# Altium PCB Route_Guide_and_Tuning.PcbDoc (part 7 of 8)
Units mil, origin at the board's own origin, x right, y up, seen from the top; angles counter-clockwise.
Board outline 3600 x 2300 mil, 14 copper layers (L1 TOP, L2_G, L3 SIG, L4_G, L4 SIG, L6_P, L7_G, L10_P, L11_P, L7 SIG, L13_P, L8 SIG, L15_G, L10 BOT), stack 89.291 mil thick; 4 components, 1934 nets, 2174 pads, 2165 vias.
Unrouted connection lines stored in the file: 123.
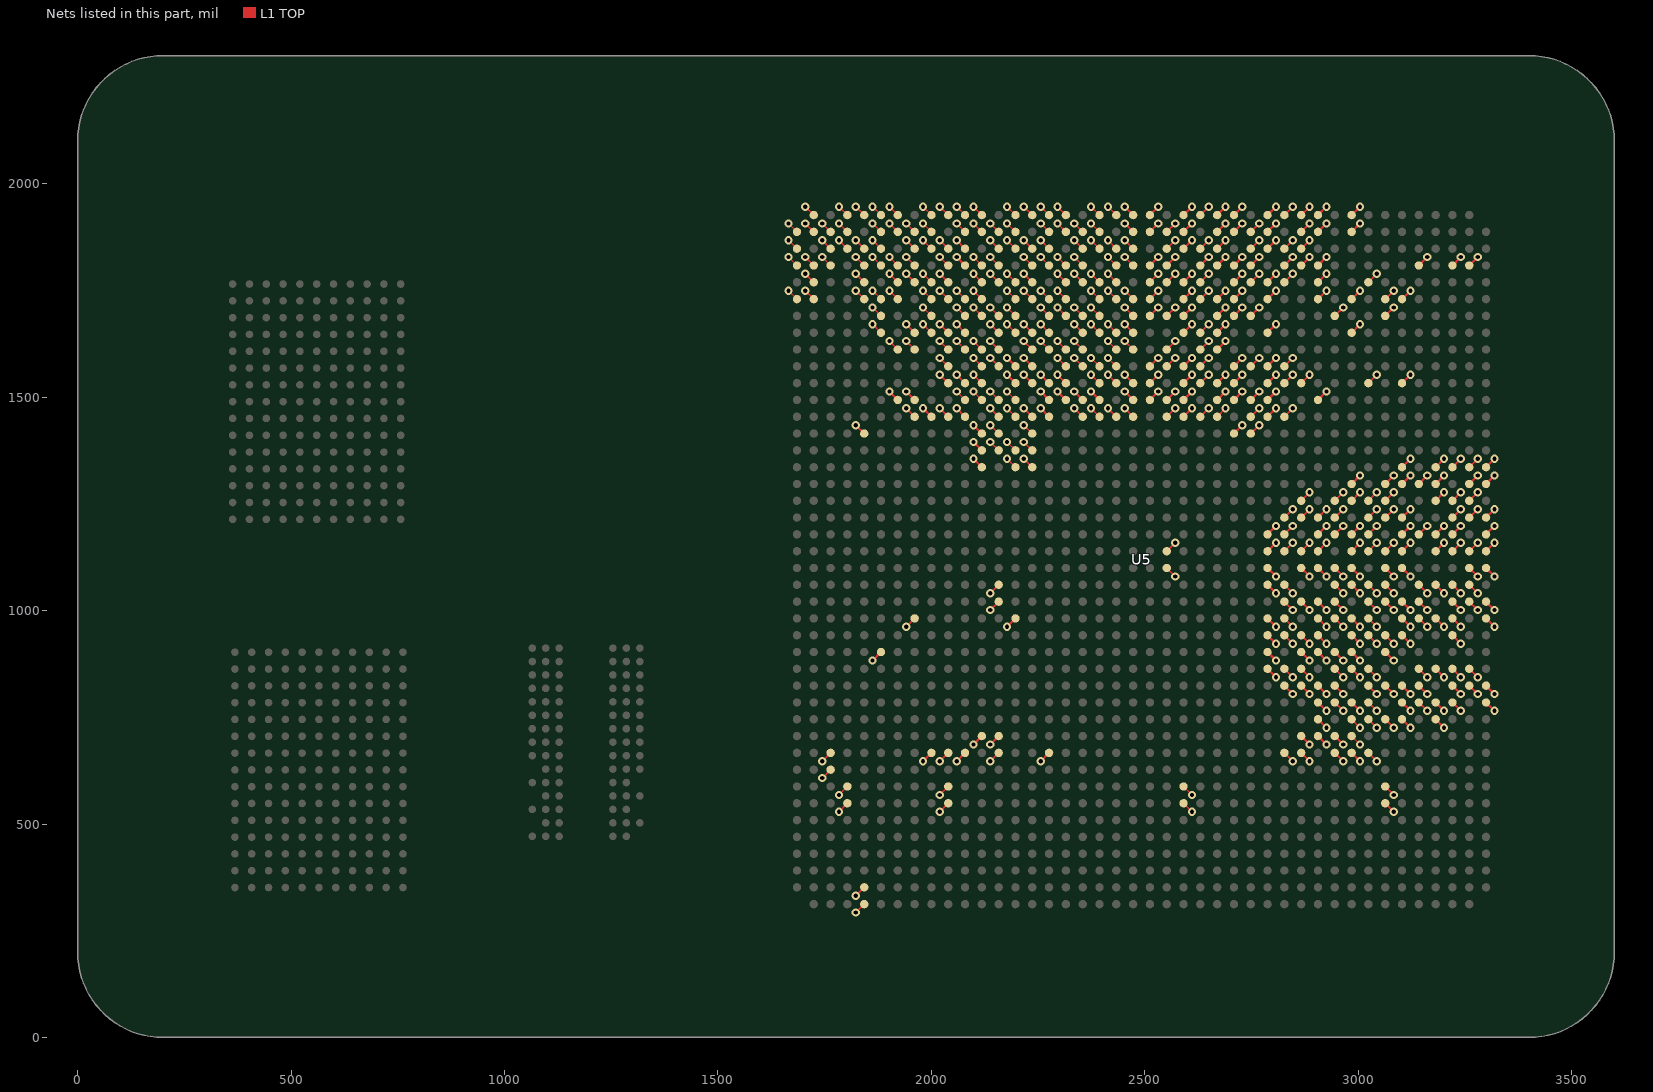
[diagram p19: the nets of this part, all layers, seen from the top]

## Via types
v1: diameter 19.4, hole 10, L1 TOP to L10 BOT, 2087 vias
v2: diameter 18.6, hole 10, L1 TOP to L10 BOT, tented both sides, 78 vias

## Nets (pads, with @x,y where several pads share a name; then routed paths per layer and width w, separated by ;. In a path a pad name is that pad's centre, name@x,y a point inside that pad or via, vN(x,y) a via of type N, cw(c..) or ccw(c..) an arc to the next point about the centre after c; other vN are vias at no path point) (continued)
QDR2.A2: U5.AL40 | length 27.8
  L1 TOP w5: U5.AL40@2866.26,1847.72 v1(2885.95,1867.4)
QDR2.A3: U5.AK39 | length 27.8
  L1 TOP w5: U5.AK39@2826.89,1808.35 v1(2846.58,1828.03)
QDR2.A4: U5.AJ41 | length 27.8
  L1 TOP w5: U5.AJ41@2787.52,1887.09 v1(2807.21,1906.77)
QDR2.A5: U5.AH41 | length 27.8
  L1 TOP w5: U5.AH41@2748.15,1887.09 v1(2767.84,1906.77)
QDR2.A6: U5.AF39 | length 27.8
  L1 TOP w5: U5.AF39@2669.41,1808.35 v1(2689.1,1828.03)
QDR2.A7: U5.AG39 | length 27.8
  L1 TOP w5: U5.AG39@2708.78,1808.35 v1(2728.47,1828.03)
QDR2.A8: U5.AJ42 | length 27.8
  L1 TOP w5: U5.AJ42@2787.52,1926.46 v1(2807.21,1946.14)
QDR2.A9: U5.AG41 | length 27.8
  L1 TOP w5: U5.AG41@2708.78,1887.09 v1(2728.47,1906.77)
QDR2.A10: U5.AG36 | length 27.8
  L1 TOP w5: U5.AG36@2708.78,1690.24 v1(2728.47,1709.92)
QDR2.A11: U5.AK42 | length 27.8
  L1 TOP w5: U5.AK42@2826.89,1926.46 v1(2846.58,1946.14)
QDR2.A12: U5.AJ40 | length 27.8
  L1 TOP w5: U5.AJ40@2787.52,1847.72 v1(2807.21,1867.4)
QDR2.A13: U5.AH39 | length 27.8
  L1 TOP w5: U5.AH39@2748.15,1808.35 v1(2767.84,1828.03)
QDR2.A14: U5.AG38 | length 27.8
  L1 TOP w5: U5.AG38@2708.78,1768.98 v1(2728.47,1788.66)
QDR2.A15: U5.AG42 | length 27.8
  L1 TOP w5: U5.AG42@2708.78,1926.46 v1(2728.47,1946.14)
QDR2.A16: U5.AF40 | length 27.8
  L1 TOP w5: U5.AF40@2669.41,1847.72 v1(2689.1,1867.4)
QDR2.A17: U5.AJ35 | length 27.8
  L1 TOP w5: U5.AJ35@2787.52,1650.87 v1(2807.21,1670.55)
QDR2.A18: U5.AK38 | length 27.8
  L1 TOP w5: U5.AK38@2826.89,1768.98 v1(2846.58,1788.66)
QDR2.A19: U5.AF37 | length 27.8
  L1 TOP w5: U5.AF37@2669.41,1729.61 v1(2689.1,1749.29)
QDR2.A20: U5.AL39 | length 27.8
  L1 TOP w5: U5.AL39@2866.26,1808.35 v1(2885.95,1828.03)
QDR2.BWN0: 
QDR2.BWN1: 
QDR2.BWN2: 
QDR2.BWN3: 
QDR2.D0: U5.AA41 | length 27.8
  L1 TOP w5: v1(2452.87,1906.77) U5.AA41@2472.56,1887.09
QDR2.D1: U5.AB41 | length 27.8
  L1 TOP w5: U5.AB41@2511.93,1887.09 v1(2531.62,1906.77)
QDR2.D2: U5.AB36 | length 27.8
  L1 TOP w5: U5.AB36@2511.93,1690.24 v1(2531.62,1709.92)
QDR2.D3: U5.AB33 | length 27.8
  L1 TOP w5: U5.AB33@2511.93,1572.13 v1(2531.62,1591.81)
QDR2.D4: U5.AD42 | length 27.8
  L1 TOP w5: U5.AD42@2590.67,1926.46 v1(2610.36,1946.14)
QDR2.D5: U5.AB32 | length 27.8
  L1 TOP w5: U5.AB32@2511.93,1532.76 v1(2531.62,1552.44)
QDR2.D6: U5.AE40 | length 27.8
  L1 TOP w5: U5.AE40@2630.04,1847.72 v1(2649.73,1867.4)
QDR2.D7: U5.AD37 | length 27.8
  L1 TOP w5: U5.AD37@2590.67,1729.61 v1(2610.36,1749.29)
QDR2.D8: U5.AC33 | length 27.8
  L1 TOP w5: U5.AC33@2551.3,1572.13 v1(2570.99,1591.81)
QDR2.D9: U5.AA42 | length 27.8
  L1 TOP w5: v1(2452.87,1946.14) U5.AA42@2472.56,1926.46
QDR2.D10: U5.AB39 | length 27.8
  L1 TOP w5: U5.AB39@2511.93,1808.35 v1(2531.62,1828.03)
QDR2.D11: U5.AB38 | length 27.8
  L1 TOP w5: U5.AB38@2511.93,1768.98 v1(2531.62,1788.66)
QDR2.D12: U5.AD41 | length 27.8
  L1 TOP w5: U5.AD41@2590.67,1887.09 v1(2610.36,1906.77)
QDR2.D13: U5.AC36 | length 27.8
  L1 TOP w5: U5.AC36@2551.3,1690.24 v1(2570.99,1709.92)
QDR2.D14: U5.AE39 | length 27.8
  L1 TOP w5: U5.AE39@2630.04,1808.35 v1(2649.73,1828.03)
QDR2.D15: U5.AD36 | length 27.8
  L1 TOP w5: U5.AD36@2590.67,1690.24 v1(2610.36,1709.92)
QDR2.D16: U5.AE34 | length 27.8
  L1 TOP w5: U5.AE34@2630.04,1611.5 v1(2649.73,1631.18)
QDR2.D17: U5.AG37 | length 27.8
  L1 TOP w5: U5.AG37@2708.78,1729.61 v1(2728.47,1749.29)
QDR2.D18: U5.AJ37 | length 27.8
  L1 TOP w5: U5.AJ37@2787.52,1729.61 v1(2807.21,1749.29)
QDR2.D19: U5.AJ38 | length 27.8
  L1 TOP w5: U5.AJ38@2787.52,1768.98 v1(2807.21,1788.66)
QDR2.D20: U5.AM39 | length 27.8
  L1 TOP w5: U5.AM39@2905.63,1808.35 v1(2925.32,1828.03)
QDR2.D21: U5.AL41 | length 27.8
  L1 TOP w5: U5.AL41@2866.26,1887.09 v1(2885.95,1906.77)
QDR2.D22: U5.AF34 | length 27.8
  L1 TOP w5: U5.AF34@2669.41,1611.5 v1(2689.1,1631.18)
QDR2.D23: U5.AD32 | length 27.8
  L1 TOP w5: U5.AD32@2590.67,1532.76 v1(2610.36,1552.44)
QDR2.D24: U5.AP35 | length 27.8
  L1 TOP w5: U5.AP35@2984.37,1650.87 v1(3004.06,1670.55)
QDR2.D25: U5.AR20 | length 27.8
  L1 TOP w5: U5.AR20@3023.74,1060.32 v1(3043.43,1040.63)
QDR2.D26: U5.AF36 | length 27.8
  L1 TOP w5: U5.AF36@2669.41,1690.24 v1(2689.1,1709.92)
QDR2.D27: U5.AM38 | length 27.8
  L1 TOP w5: U5.AM38@2905.63,1768.98 v1(2925.32,1788.66)
QDR2.D28: U5.AP41 | length 27.8
  L1 TOP w5: U5.AP41@2984.37,1887.09 v1(3004.06,1906.77)
QDR2.D29: U5.AK40 | length 27.8
  L1 TOP w5: U5.AK40@2826.89,1847.72 v1(2846.58,1867.4)
QDR2.D30: U5.AT20 | length 27.8
  L1 TOP w5: U5.AT20@3063.11,1060.32 v1(3082.8,1040.63)
QDR2.D31: U5.AP42 | length 27.8
  L1 TOP w5: U5.AP42@2984.37,1926.46 v1(3004.06,1946.14)
QDR2.D32: U5.AM37 | length 27.8
  L1 TOP w5: U5.AM37@2905.63,1729.61 v1(2925.32,1749.29)
QDR2.D33: U5.AM31 | length 27.8
  L1 TOP w5: U5.AM31@2905.63,1493.39 v1(2925.32,1513.07)
QDR2.D34: U5.AR32 | length 27.8
  L1 TOP w5: U5.AR32@3023.74,1532.76 v1(3043.43,1552.44)
QDR2.D35: U5.AU32 | length 27.8
  L1 TOP w5: U5.AU32@3102.48,1532.76 v1(3122.17,1552.44)
QDR2.DOFFN: U5.P18 | length 27.8
  L1 TOP w5: v1(2177.28,961.89) U5.P18@2196.97,981.57
QDR2.K: U5.AH40 | length 27.8
  L1 TOP w5: U5.AH40@2748.15,1847.72 v1(2767.84,1867.4)
QDR2.KN: U5.AM42 | length 27.8
  L1 TOP w5: U5.AM42@2905.63,1926.46 v1(2925.32,1946.14)
QDR2.Q0: U5.AA40 | length 27.8
  L1 TOP w5: v1(2452.87,1867.4) U5.AA40@2472.56,1847.72
QDR2.Q1: U5.AE33 | length 27.8
  L1 TOP w5: U5.AE33@2630.04,1572.13 v1(2649.73,1591.81)
QDR2.Q2: U5.AE32 | length 27.8
  L1 TOP w5: U5.AE32@2630.04,1532.76 v1(2649.73,1552.44)
QDR2.Q3: U5.AC40 | length 27.8
  L1 TOP w5: U5.AC40@2551.3,1847.72 v1(2570.99,1867.4)
QDR2.Q4: U5.AC34 | length 27.8
  L1 TOP w5: U5.AC34@2551.3,1611.5 v1(2570.99,1631.18)
QDR2.Q5: U5.AE42 | length 27.8
  L1 TOP w5: U5.AE42@2630.04,1926.46 v1(2649.73,1946.14)
QDR2.Q6: U5.AD33 | length 27.8
  L1 TOP w5: U5.AD33@2590.67,1572.13 v1(2610.36,1591.81)
QDR2.Q7: U5.AE38 | length 27.8
  L1 TOP w5: U5.AE38@2630.04,1768.98 v1(2649.73,1788.66)
QDR2.Q8: U5.AE37 | length 27.8
  L1 TOP w5: U5.AE37@2630.04,1729.61 v1(2649.73,1749.29)
QDR2.Q9: U5.AB42 | length 27.8
  L1 TOP w5: U5.AB42@2511.93,1926.46 v1(2531.62,1946.14)
QDR2.Q10: U5.AB37 | length 27.8
  L1 TOP w5: U5.AB37@2511.93,1729.61 v1(2531.62,1749.29)
QDR2.Q11: U5.AC41 | length 27.8
  L1 TOP w5: U5.AC41@2551.3,1887.09 v1(2570.99,1906.77)
QDR2.Q12: U5.AC38 | length 27.8
  L1 TOP w5: U5.AC38@2551.3,1768.98 v1(2570.99,1788.66)
QDR2.Q13: U5.AD40 | length 27.8
  L1 TOP w5: U5.AD40@2590.67,1847.72 v1(2610.36,1867.4)
QDR2.Q14: U5.AD38 | length 27.8
  L1 TOP w5: U5.AD38@2590.67,1768.98 v1(2610.36,1788.66)
QDR2.Q15: U5.AF41 | length 27.8
  L1 TOP w5: U5.AF41@2669.41,1887.09 v1(2689.1,1906.77)
QDR2.Q16: U5.AF42 | length 27.8
  L1 TOP w5: U5.AF42@2669.41,1926.46 v1(2689.1,1946.14)
QDR2.Q17: U5.AE35 | length 27.8
  L1 TOP w5: U5.AE35@2630.04,1650.87 v1(2649.73,1670.55)
QDR2.Q18: U5.AR38 | length 27.8
  L1 TOP w5: U5.AR38@3023.74,1768.98 v1(3043.43,1788.66)
QDR2.Q19: U5.AJ21 | length 27.8
  L1 TOP w5: U5.AJ21@2787.52,1099.69 v1(2807.21,1080)
QDR2.Q20: U5.AP37 | length 27.8
  L1 TOP w5: U5.AP37@2984.37,1729.61 v1(3004.06,1749.29)
QDR2.Q21: U5.AT37 | length 27.8
  L1 TOP w5: U5.AT37@3063.11,1729.61 v1(3082.8,1749.29)
QDR2.Q22: U5.AN36 | length 27.8
  L1 TOP w5: U5.AN36@2945,1690.24 v1(2964.69,1709.92)
QDR2.Q23: U5.AV23 | length 27.8
  L1 TOP w5: U5.AV23@3141.85,1178.43 v1(3161.54,1198.11)
QDR2.Q24: U5.AU22 | length 27.8
  L1 TOP w5: U5.AU22@3102.48,1139.06 v1(3122.17,1158.74)
QDR2.Q25: U5.BB24 | length 27.8
  L1 TOP w5: U5.BB24@3299.33,1217.8 v1(3319.02,1237.48)
QDR2.Q26: U5.BA39 | length 27.8
  L1 TOP w5: U5.BA39@3259.96,1808.35 v1(3279.65,1828.03)
QDR2.Q27: U5.AU37 | length 27.8
  L1 TOP w5: U5.AU37@3102.48,1729.61 v1(3122.17,1749.29)
QDR2.Q28: U5.AN21 | length 27.8
  L1 TOP w5: U5.AN21@2945,1099.69 v1(2964.69,1080)
QDR2.Q29: U5.AT36 | length 27.8
  L1 TOP w5: U5.AT36@3063.11,1690.24 v1(3082.8,1709.92)
QDR2.Q30: U5.AV39 | length 27.8
  L1 TOP w5: U5.AV39@3141.85,1808.35 v1(3161.54,1828.03)
QDR2.Q31: U5.AY39 | length 27.8
  L1 TOP w5: U5.AY39@3220.59,1808.35 v1(3240.28,1828.03)
QDR2.Q32: U5.AY24 | length 27.8
  L1 TOP w5: U5.AY24@3220.59,1217.8 v1(3240.28,1237.48)
QDR2.Q33: U5.AW22 | length 27.8
  L1 TOP w5: U5.AW22@3181.22,1139.06 v1(3200.91,1158.74)
QDR2.Q34: U5.AR22 | length 27.8
  L1 TOP w5: U5.AR22@3023.74,1139.06 v1(3043.43,1158.74)
QDR2.Q35: U5.BA24 | length 27.8
  L1 TOP w5: U5.BA24@3259.96,1217.8 v1(3279.65,1237.48)
QDR2.RDN: U5.AL42 | length 27.8
  L1 TOP w5: U5.AL42@2866.26,1926.46 v1(2885.95,1946.14)
QDR2.WRN: U5.AM41 | length 27.8
  L1 TOP w5: U5.AM41@2905.63,1887.09 v1(2925.32,1906.77)
QDR2_TCK: 
QDR2_TDI: 
QDR2_TDO: 
QDR2_TMS: 
QDR3.A0: U5.AK19 | length 27.8
  L1 TOP w5: U5.AK19@2826.89,1020.94 v1(2846.58,1001.26)
QDR3.A1: U5.AT21 | length 27.8
  L1 TOP w5: U5.AT21@3063.11,1099.69 v1(3082.8,1080)
QDR3.A2: U5.AL19 | length 27.8
  L1 TOP w5: U5.AL19@2866.26,1020.94 v1(2885.95,1001.26)
QDR3.A3: U5.AP20 | length 27.8
  L1 TOP w5: U5.AP20@2984.37,1060.32 v1(3004.06,1040.63)
QDR3.A4: U5.AM19 | length 27.8
  L1 TOP w5: U5.AM19@2905.63,1020.94 v1(2925.32,1001.26)
QDR3.A5: U5.AM21 | length 27.8
  L1 TOP w5: U5.AM21@2905.63,1099.69 v1(2925.32,1080)
QDR3.A6: U5.AP22 | length 27.8
  L1 TOP w5: U5.AP22@2984.37,1139.06 v1(3004.06,1158.74)
QDR3.A7: U5.BA20 | length 27.8
  L1 TOP w5: U5.BA20@3259.96,1060.32 v1(3279.65,1040.63)
QDR3.A8: U5.AL21 | length 27.8
  L1 TOP w5: U5.AL21@2866.26,1099.69 v1(2885.95,1080)
QDR3.A9: U5.BB22 | length 27.8
  L1 TOP w5: U5.BB22@3299.33,1139.06 v1(3319.02,1158.74)
QDR3.A10: U5.BA22 | length 27.8
  L1 TOP w5: U5.BA22@3259.96,1139.06 v1(3279.65,1158.74)
QDR3.A11: U5.AV20 | length 27.8
  L1 TOP w5: U5.AV20@3141.85,1060.32 v1(3161.54,1040.63)
QDR3.A12: U5.AY20 | length 27.8
  L1 TOP w5: U5.AY20@3220.59,1060.32 v1(3240.28,1040.63)
QDR3.A13: U5.AW23 | length 27.8
  L1 TOP w5: U5.AW23@3181.22,1178.43 v1(3200.91,1198.11)
QDR3.A14: U5.BB23 | length 27.8
  L1 TOP w5: U5.BB23@3299.33,1178.43 v1(3319.02,1198.11)
QDR3.A15: U5.BB21 | length 27.8
  L1 TOP w5: U5.BB21@3299.33,1099.69 v1(3319.02,1080)
QDR3.A16: U5.AT22 | length 27.8
  L1 TOP w5: U5.AT22@3063.11,1139.06 v1(3082.8,1158.74)
QDR3.A17: U5.AY22 | length 27.8
  L1 TOP w5: U5.AY22@3220.59,1139.06 v1(3240.28,1158.74)
QDR3.A18: U5.AJ20 | length 27.8
  L1 TOP w5: U5.AJ20@2787.52,1060.32 v1(2807.21,1040.63)
QDR3.A19: U5.AW20 | length 27.8
  L1 TOP w5: U5.AW20@3181.22,1060.32 v1(3200.91,1040.63)
QDR3.A20: U5.AJ18 | length 27.8
  L1 TOP w5: U5.AJ18@2787.52,981.57 v1(2807.21,961.89)
QDR3.BWN0: 
QDR3.BWN1: 
QDR3.BWN2: 
QDR3.BWN3: 
QDR3.D0: U5.AN24 | length 27.8
  L1 TOP w5: U5.AN24@2945,1217.8 v1(2964.69,1237.48)
QDR3.D1: U5.BB27 | length 27.8
  L1 TOP w5: U5.BB27@3299.33,1335.91 v1(3319.02,1355.59)
QDR3.D2: U5.BB26 | length 27.8
  L1 TOP w5: U5.BB26@3299.33,1296.54 v1(3319.02,1316.22)
QDR3.D3: U5.AT26 | length 27.8
  L1 TOP w5: U5.AT26@3063.11,1296.54 v1(3082.8,1316.22)
QDR3.D4: U5.AU24 | length 27.8
  L1 TOP w5: U5.AU24@3102.48,1217.8 v1(3122.17,1237.48)
QDR3.D5: U5.AR24 | length 27.8
  L1 TOP w5: U5.AR24@3023.74,1217.8 v1(3043.43,1237.48)
QDR3.D6: U5.AR23 | length 27.8
  L1 TOP w5: U5.AR23@3023.74,1178.43 v1(3043.43,1198.11)
QDR3.D7: U5.AL24 | length 27.8
  L1 TOP w5: U5.AL24@2866.26,1217.8 v1(2885.95,1237.48)
QDR3.D8: U5.AL22 | length 27.8
  L1 TOP w5: U5.AL22@2866.26,1139.06 v1(2885.95,1158.74)
QDR3.D9: U5.AN25 | length 27.8
  L1 TOP w5: U5.AN25@2945,1257.17 v1(2964.69,1276.85)
QDR3.D10: U5.AW27 | length 27.8
  L1 TOP w5: U5.AW27@3181.22,1335.91 v1(3200.91,1355.59)
QDR3.D11: U5.AU26 | length 27.8
  L1 TOP w5: U5.AU26@3102.48,1296.54 v1(3122.17,1316.22)
QDR3.D12: U5.AW25 | length 27.8
  L1 TOP w5: U5.AW25@3181.22,1257.17 v1(3200.91,1276.85)
QDR3.D13: U5.AR25 | length 27.8
  L1 TOP w5: U5.AR25@3023.74,1257.17 v1(3043.43,1276.85)
QDR3.D14: U5.AU23 | length 27.8
  L1 TOP w5: U5.AU23@3102.48,1178.43 v1(3122.17,1198.11)
QDR3.D15: U5.AM22 | length 27.8
  L1 TOP w5: U5.AM22@2905.63,1139.06 v1(2925.32,1158.74)
QDR3.D16: U5.AK23 | length 27.8
  L1 TOP w5: U5.AK23@2826.89,1178.43 v1(2846.58,1198.11)
QDR3.D17: U5.AJ23 | length 27.8
  L1 TOP w5: U5.AJ23@2787.52,1178.43 v1(2807.21,1198.11)
QDR3.D18: U5.AR17 | length 27.8
  L1 TOP w5: U5.AR17@3023.74,942.2 v1(3043.43,922.52)
QDR3.D19: U5.AP17 | length 27.8
  L1 TOP w5: U5.AP17@2984.37,942.2 v1(3004.06,922.52)
QDR3.D20: U5.AU17 | length 27.8
  L1 TOP w5: U5.AU17@3102.48,942.2 v1(3122.17,922.52)
QDR3.D21: U5.AU18 | length 27.8
  L1 TOP w5: U5.AU18@3102.48,981.57 v1(3122.17,961.89)
QDR3.D22: U5.AL15 | length 27.8
  L1 TOP w5: U5.AL15@2866.26,863.46 v1(2885.95,843.78)
QDR3.D23: U5.AU19 | length 27.8
  L1 TOP w5: U5.AU19@3102.48,1020.94 v1(3122.17,1001.26)
QDR3.D24: U5.AY18 | length 27.8
  L1 TOP w5: U5.AY18@3220.59,981.57 v1(3240.28,961.89)
QDR3.D25: U5.BB18 | length 27.8
  L1 TOP w5: U5.BB18@3299.33,981.57 v1(3319.02,961.89)
QDR3.D26: U5.BB19 | length 27.8
  L1 TOP w5: U5.BB19@3299.33,1020.94 v1(3319.02,1001.26)
QDR3.D27: U5.AM17 | length 27.8
  L1 TOP w5: U5.AM17@2905.63,942.2 v1(2925.32,922.52)
QDR3.D28: U5.AM16 | length 27.8
  L1 TOP w5: U5.AM16@2905.63,902.83 v1(2925.32,883.15)
QDR3.D29: U5.AJ16 | length 27.8
  L1 TOP w5: U5.AJ16@2787.52,902.83 v1(2807.21,883.15)
QDR3.D30: U5.AN15 | length 27.8
  L1 TOP w5: U5.AN15@2945,863.46 v1(2964.69,843.78)
QDR3.D31: U5.AK15 | length 27.8
  L1 TOP w5: U5.AK15@2826.89,863.46 v1(2846.58,843.78)
QDR3.D32: U5.AM14 | length 27.8
  L1 TOP w5: U5.AM14@2905.63,824.09 v1(2925.32,804.41)
QDR3.D33: U5.AP18 | length 27.8
  L1 TOP w5: U5.AP18@2984.37,981.57 v1(3004.06,961.89)
QDR3.D34: U5.AN18 | length 27.8
  L1 TOP w5: U5.AN18@2945,981.57 v1(2964.69,961.89)
QDR3.D35: U5.AN19 | length 27.8
  L1 TOP w5: U5.AN19@2945,1020.94 v1(2964.69,1001.26)
QDR3.DOFFN: U5.AL17 | length 27.8
  L1 TOP w5: U5.AL17@2866.26,942.2 v1(2885.95,922.52)
QDR3.K: U5.AN20 | length 27.8
  L1 TOP w5: U5.AN20@2945,1060.32 v1(2964.69,1040.63)
QDR3.KN: U5.AP21 | length 27.8
  L1 TOP w5: U5.AP21@2984.37,1099.69 v1(3004.06,1080)
QDR3.Q0: U5.AY27 | length 27.8
  L1 TOP w5: U5.AY27@3220.59,1335.91 v1(3240.28,1355.59)
QDR3.Q1: U5.AV26 | length 27.8
  L1 TOP w5: U5.AV26@3141.85,1296.54 v1(3161.54,1316.22)
QDR3.Q2: U5.AW26 | length 27.8
  L1 TOP w5: U5.AW26@3181.22,1296.54 v1(3200.91,1316.22)
QDR3.Q3: U5.BA25 | length 27.8
  L1 TOP w5: U5.BA25@3259.96,1257.17 v1(3279.65,1276.85)
QDR3.Q4: U5.AT25 | length 27.8
  L1 TOP w5: U5.AT25@3063.11,1257.17 v1(3082.8,1276.85)
QDR3.Q5: U5.AT24 | length 27.8
  L1 TOP w5: U5.AT24@3063.11,1217.8 v1(3082.8,1237.48)
QDR3.Q6: U5.AP23 | length 27.8
  L1 TOP w5: U5.AP23@2984.37,1178.43 v1(3004.06,1198.11)
QDR3.Q7: U5.AM23 | length 27.8
  L1 TOP w5: U5.AM23@2905.63,1178.43 v1(2925.32,1198.11)
QDR3.Q8: U5.AK24 | length 27.8
  L1 TOP w5: U5.AK24@2826.89,1217.8 v1(2846.58,1237.48)
QDR3.Q9: U5.AU27 | length 27.8
  L1 TOP w5: U5.AU27@3102.48,1335.91 v1(3122.17,1355.59)
QDR3.Q10: U5.AP26 | length 27.8
  L1 TOP w5: U5.AP26@2984.37,1296.54 v1(3004.06,1316.22)
QDR3.Q11: U5.BA26 | length 27.8
  L1 TOP w5: U5.BA26@3259.96,1296.54 v1(3279.65,1316.22)
QDR3.Q12: U5.AL25 | length 27.8
  L1 TOP w5: U5.AL25@2866.26,1257.17 v1(2885.95,1276.85)
QDR3.Q13: U5.AP25 | length 27.8
  L1 TOP w5: U5.AP25@2984.37,1257.17 v1(3004.06,1276.85)
QDR3.Q14: U5.AK22 | length 27.8
  L1 TOP w5: U5.AK22@2826.89,1139.06 v1(2846.58,1158.74)
QDR3.Q15: U5.AJ22 | length 27.8
  L1 TOP w5: U5.AJ22@2787.52,1139.06 v1(2807.21,1158.74)
QDR3.Q16: U5.AN23 | length 27.8
  L1 TOP w5: U5.AN23@2945,1178.43 v1(2964.69,1198.11)
QDR3.Q17: U5.AM24 | length 27.8
  L1 TOP w5: U5.AM24@2905.63,1217.8 v1(2925.32,1237.48)
QDR3.Q18: U5.AT17 | length 27.8
  L1 TOP w5: U5.AT17@3063.11,942.2 v1(3082.8,922.52)
QDR3.Q19: U5.AV18 | length 27.8
  L1 TOP w5: U5.AV18@3141.85,981.57 v1(3161.54,961.89)
QDR3.Q20: U5.AR19 | length 27.8
  L1 TOP w5: U5.AR19@3023.74,1020.94 v1(3043.43,1001.26)
QDR3.Q21: U5.AR18 | length 27.8
  L1 TOP w5: U5.AR18@3023.74,981.57 v1(3043.43,961.89)
QDR3.Q22: U5.AW18 | length 27.8
  L1 TOP w5: U5.AW18@3181.22,981.57 v1(3200.91,961.89)
QDR3.Q23: U5.AV19 | length 27.8
  L1 TOP w5: U5.AV19@3141.85,1020.94 v1(3161.54,1001.26)
QDR3.Q24: U5.AJ17 | length 27.8
  L1 TOP w5: U5.AJ17@2787.52,942.2 v1(2807.21,922.52)
QDR3.Q25: U5.AY19 | length 27.8
  L1 TOP w5: U5.AY19@3220.59,1020.94 v1(3240.28,1001.26)
QDR3.Q26: U5.BA19 | length 27.8
  L1 TOP w5: U5.BA19@3259.96,1020.94 v1(3279.65,1001.26)
QDR3.Q27: U5.AT16 | length 27.8
  L1 TOP w5: U5.AT16@3063.11,902.83 v1(3082.8,883.15)
QDR3.Q28: U5.AK18 | length 27.8
  L1 TOP w5: U5.AK18@2826.89,981.57 v1(2846.58,961.89)
QDR3.Q29: U5.AK17 | length 27.8
  L1 TOP w5: U5.AK17@2826.89,942.2 v1(2846.58,922.52)
QDR3.Q30: U5.AP16 | length 27.8
  L1 TOP w5: U5.AP16@2984.37,902.83 v1(3004.06,883.15)
QDR3.Q31: U5.AT19 | length 27.8
  L1 TOP w5: U5.AT19@3063.11,1020.94 v1(3082.8,1001.26)
QDR3.Q32: U5.AN16 | length 27.8
  L1 TOP w5: U5.AN16@2945,902.83 v1(2964.69,883.15)
QDR3.Q33: U5.AL14 | length 27.8
  L1 TOP w5: U5.AL14@2866.26,824.09 v1(2885.95,804.41)
QDR3.Q34: U5.AJ15 | length 27.8
  L1 TOP w5: U5.AJ15@2787.52,863.46 v1(2807.21,843.78)
QDR3.Q35: U5.AK14 | length 27.8
  L1 TOP w5: U5.AK14@2826.89,824.09 v1(2846.58,804.41)
QDR3.RDN: U5.AU21 | length 27.8
  L1 TOP w5: U5.AU21@3102.48,1099.69 v1(3122.17,1080)
QDR3.WRN: U5.AK20 | length 27.8
  L1 TOP w5: U5.AK20@2826.89,1060.32 v1(2846.58,1040.63)
QDR3_TCK: 
QDR3_TDI: 
QDR3_TDO: 
QDR3_TMS: 
QDR23_VREF: U5.AC39 U5.AD35 U5.AH36 U5.AH38 U5.AL16 U5.AM18 U5.AY23 U5.AY25 U5.BA21 U5.BA27 | length 278.4
  L1 TOP w5: U5.AC39@2551.3,1808.35 v1(2570.99,1828.03) ; U5.AD35@2590.67,1650.87 v1(2610.36,1670.55) ; U5.AH36@2748.15,1690.24 v1(2767.84,1709.92) ; U5.AH38@2748.15,1768.98 v1(2767.84,1788.66) ; U5.AL16@2866.26,902.83 v1(2885.95,883.15) ; U5.AM18@2905.63,981.57 v1(2925.32,961.89) ; U5.AY23@3220.59,1178.43 v1(3240.28,1198.11) ; U5.AY25@3220.59,1257.17 v1(3240.28,1276.85) ; U5.BA21@3259.96,1099.69 v1(3279.65,1080) ; U5.BA27@3259.96,1335.91 v1(3279.65,1355.59)
QDR23_VTT: 
RESET_PBN: 
RTC_IRQN: 
SGMII_ACTX_N: 
SGMII_ACTX_P: 
SGMII_CLKAC_N: 
SGMII_CLKAC_P: 
SGMII_CLKREF_N: U5.C9 | length 27.8
  L1 TOP w5: v1(1744.21,607.56) U5.C9@1763.9,627.24
SGMII_CLKREF_P: U5.C10 | length 27.8
  L1 TOP w5: v1(1744.21,646.93) U5.C10@1763.9,666.61
SGMII_RX_AC_N: U5.D8 | length 27.8
  L1 TOP w3.8: v1(1783.58,568.19) U5.D8@1803.27,587.87
SGMII_RX_AC_P: U5.D7 | length 27.8
  L1 TOP w3.8: v1(1783.58,528.82) U5.D7@1803.27,548.5
SGMII_RX_N: 
SGMII_RX_P: 
SGMII_TX_N: U5.E2 | length 27.8
  L1 TOP w3.8: v1(1822.95,331.97) U5.E2@1842.64,351.65
SGMII_TX_P: U5.E1 | length 27.8
  L1 TOP w3.8: v1(1822.95,292.6) U5.E1@1842.64,312.28
SM_DBUSY: U5.AK10 | length 27.8
  L1 TOP w5: U5.AK10@2826.89,666.61 v1(2846.58,646.93)
SM_DIN: U5.L10 | length 27.8
  L1 TOP w5: v1(2059.17,646.93) U5.L10@2078.86,666.61
SM_DONE: U5.N10 | length 27.8
  L1 TOP w5: v1(2137.91,646.93) U5.N10@2157.6,666.61
SM_INITN: U5.N11 | length 27.8
  L1 TOP w5: v1(2137.91,686.3) U5.N11@2157.6,705.98
SM_MODE0: U5.AL11 | length 27.8
  L1 TOP w5: U5.AL11@2866.26,705.98 v1(2885.95,686.3)
SM_MODE1: U5.AM11 | length 27.8
  L1 TOP w5: U5.AM11@2905.63,705.98 v1(2925.32,686.3)
SM_MODE2: U5.AL10 | length 27.8
  L1 TOP w5: U5.AL10@2866.26,666.61 v1(2885.95,646.93)
SM_PROGN: U5.M11 | length 27.8
  L1 TOP w5: v1(2098.54,686.3) U5.M11@2118.23,705.98
SM_RDWRN: U5.J10 | length 27.8
  L1 TOP w5: v1(1980.43,646.93) U5.J10@2000.12,666.61
SYS_CLK_N: U5.AP12 | length 27.8
  L1 TOP w3.8: U5.AP12@2984.37,745.35 v1(3004.06,725.67)
SYS_CLK_P: U5.AP11 | length 27.8
  L1 TOP w3.8: U5.AP11@2984.37,705.98 v1(3004.06,686.3)
SYS_PORN: 
SYS_TCK: 
SYS_TDI: 
SYS_TDO: 
SYS_TDO_INT: 
SYS_TMS: 
SYS_TRSTN: 
SYS_WPN: 
TDI: 
THERM_ALERTN: 
TRC_CLK: 
TRC_HALT: 
TRC_TCK: 
TRC_TDI: 
TRC_TDO: 
TRC_TMS: 
TRC_TRSTN: 
TRCBS0: 
TRCBS1: 
TRCBS2: 
TRCES0: 
TRCES1: 
TRCES2: 
TRCES3: 
TRCES4: 
TRCTS0: 
TRCTS1: 
TRCTS2: 
TRCTS3: 
TRCTS4: 
TRCTS5: 
TRCTS6: 
TRSTN: 
UART0_RX: 
UART0_TX: 
UART1_CTSN: 
UART1_CTSN-BC2: 
UART1_RTSN: 
UART1_RTSN-BC1: 
UART1_RX: 
UART1_TX: 
V6_GPIO0: U5.G31 | length 27.8
  L1 TOP w5: v1(1901.69,1513.07) U5.G31@1921.38,1493.39
V6_GPIO1: U5.H31 | length 27.8
  L1 TOP w5: v1(1941.06,1513.07) U5.H31@1960.75,1493.39
V6_GPIO2: U5.AF32 | length 27.8
  L1 TOP w5: U5.AF32@2669.41,1532.76 v1(2689.1,1552.44)
V6_GPIO3: U5.AG33 | length 27.8
  L1 TOP w5: U5.AG33@2708.78,1572.13 v1(2728.47,1591.81)
V6_GPIO4: U5.L30 | length 27.8
  L1 TOP w5: v1(2059.17,1473.7) U5.L30@2078.86,1454.02
V6_GPIO5: U5.H30 | length 27.8
  L1 TOP w5: v1(1941.06,1473.7) U5.H30@1960.75,1454.02
V6_GPIO6: U5.M29 | length 27.8
  L1 TOP w5: v1(2098.54,1434.33) U5.M29@2118.23,1414.65
V6_GPIO7: U5.J30 | length 27.8
  L1 TOP w5: v1(1980.43,1473.7) U5.J30@2000.12,1454.02
V6_GPIO8: U5.M28 | length 27.8
  L1 TOP w5: v1(2098.54,1394.96) U5.M28@2118.23,1375.28
V6_GPIO9: U5.K30 | length 27.8
  L1 TOP w5: v1(2019.8,1473.7) U5.K30@2039.49,1454.02
V6_GPIO10: U5.N19 | length 27.8
  L1 TOP w5: v1(2137.91,1001.26) U5.N19@2157.6,1020.94
V6_GPIO11: U5.N20 | length 27.8
  L1 TOP w5: v1(2137.91,1040.63) U5.N20@2157.6,1060.32
V6_GPIO12: U5.H18 | length 27.8
  L1 TOP w5: v1(1941.06,961.89) U5.H18@1960.75,981.57
V6_GPIO13: U5.F16 | length 27.8
  L1 TOP w5: v1(1862.32,883.15) U5.F16@1882.01,902.83
V6_GPIO14: U5.E29 | length 27.8
  L1 TOP w5: v1(1822.95,1434.33) U5.E29@1842.64,1414.65
V6_GPIO15: U5.M27 | length 27.8
  L1 TOP w5: v1(2098.54,1355.59) U5.M27@2118.23,1335.91
V6_IRQN: U5.AY17 | length 27.8
  L1 TOP w5: U5.AY17@3220.59,942.2 v1(3240.28,922.52)
V6_TCK: U5.AN10 | length 27.8
  L1 TOP w5: U5.AN10@2945,666.61 v1(2964.69,646.93)
V6_TDI: U5.AP10 | length 27.8
  L1 TOP w5: U5.AP10@2984.37,666.61 v1(3004.06,646.93)
V6_TDO: U5.AR10 | length 27.8
  L1 TOP w5: U5.AR10@3023.74,666.61 v1(3043.43,646.93)
V6_THERM_N: U5.AC21 | length 27.8
  L1 TOP w3.8: U5.AC21@2551.3,1099.69 v1(2570.99,1080)
V6_THERM_P: U5.AC22 | length 27.8
  L1 TOP w3.8: U5.AC22@2551.3,1139.06 v1(2570.99,1158.74)
V6_TMS: U5.AN11 | length 27.8
  L1 TOP w5: U5.AN11@2945,705.98 v1(2964.69,686.3)
V6GETH_CLK25: 
V6LED_ACTIVITY: 
V6LED_DUPLEX: 
V6LED_LINK: 
V6LED_LINK10: 
V6LED_LINK100: 
V6LED_LINK1000: 
V6LED_RX: 
V6LED_TX: 
V6MDI_0_N: 
V6MDI_0_P: 
V6MDI_1_N: 
V6MDI_1_P: 
V6MDI_2_N: 
V6MDI_2_P: 
V6MDI_3_N: 
V6MDI_3_P: 
V6NET_AVDD: 
V6NET_TCK: 
V6NET_TDI: 
V6NET_TDO: 
V6NET_TMS: 
VBAT: 
VBUS_FTDI: 
VCC_JTAG: 
VMON_FAULTN: 
VMON_TCK: 
VMON_TDI: 
VMON_TDO: 
VMON_TMS: 
XAUI_CLK_N: 
XAUI_CLK_P: 
XAUI_CLKAC0_N: 
XAUI_CLKAC0_P: 
XAUI_CLKAC1_N: 
XAUI_CLKAC1_P: 
XAUI_CLKAC2_N: 
XAUI_CLKAC2_P: 
XAUI_CLKREF0_N: U5.AT7 | length 27.8
  L1 TOP w3.8: U5.AT7@3063.11,548.5 v1(3082.8,528.82)
XAUI_CLKREF0_P: U5.AT8 | length 27.8
  L1 TOP w3.8: U5.AT8@3063.11,587.87 v1(3082.8,568.19)
XAUI_CLKREF1_N: U5.AD7 | length 27.8
  L1 TOP w3.8: U5.AD7@2590.67,548.5 v1(2610.36,528.82)
XAUI_CLKREF1_P: U5.AD8 | length 27.8
  L1 TOP w3.8: U5.AD8@2590.67,587.87 v1(2610.36,568.19)
XAUI_CLKREF2_N: U5.K7 | length 27.8
  L1 TOP w3.8: v1(2019.8,528.82) U5.K7@2039.49,548.5
XAUI_CLKREF2_P: U5.K8 | length 27.8
  L1 TOP w3.8: v1(2019.8,568.19) U5.K8@2039.49,587.87
XL.DOEN: U5.AF35 | length 27.8
  L1 TOP w5: U5.AF35@2669.41,1650.87 v1(2689.1,1670.55)
XL.PADDR5: U5.AT14 | length 27.8
  L1 TOP w5: U5.AT14@3063.11,824.09 v1(3082.8,804.41)
XL.PADDR6: U5.AR14 | length 27.8
  L1 TOP w5: U5.AR14@3023.74,824.09 v1(3043.43,804.41)
XL.PADDR7: U5.AR15 | length 27.8
  L1 TOP w5: U5.AR15@3023.74,863.46 v1(3043.43,843.78)
XL.PADDR8: U5.AP15 | length 27.8
  L1 TOP w5: U5.AP15@2984.37,863.46 v1(3004.06,843.78)
XL.PADDR9: U5.AN13 | length 27.8
  L1 TOP w5: U5.AN13@2945,784.72 v1(2964.69,765.04)
XL.PADDR10: U5.AN14 | length 27.8
  L1 TOP w5: U5.AN14@2945,824.09 v1(2964.69,804.41)
XL.PADDR11: U5.AM12 | length 27.8
  L1 TOP w5: U5.AM12@2905.63,745.35 v1(2925.32,725.67)
XL.PADDR12: U5.AM13 | length 27.8
  L1 TOP w5: U5.AM13@2905.63,784.72 v1(2925.32,765.04)
XL.PADDR13: U5.AV14 | length 27.8
  L1 TOP w5: U5.AV14@3141.85,824.09 v1(3161.54,804.41)
XL.PADDR14: U5.AJ32 | length 27.8
  L1 TOP w5: U5.AJ32@2787.52,1532.76 v1(2807.21,1552.44)
XL.PADDR15: U5.AJ31 | length 27.8
  L1 TOP w5: U5.AJ31@2787.52,1493.39 v1(2807.21,1513.07)
XL.PADDR16: U5.AK30 | length 27.8
  L1 TOP w5: U5.AK30@2826.89,1454.02 v1(2846.58,1473.7)
XL.PADDR17: U5.AJ30 | length 27.8
  L1 TOP w5: U5.AJ30@2787.52,1454.02 v1(2807.21,1473.7)
XL.PADDR18: U5.AK33 | length 27.8
  L1 TOP w5: U5.AK33@2826.89,1572.13 v1(2846.58,1591.81)
XL.PADDR19: U5.AH30 | length 27.8
  L1 TOP w5: U5.AH30@2748.15,1454.02 v1(2767.84,1473.7)
XL.PADDR20: U5.AH29 | length 27.8
  L1 TOP w5: U5.AH29@2748.15,1414.65 v1(2767.84,1434.33)
XL.PADDR21: U5.AG29 | length 27.8
  L1 TOP w5: U5.AG29@2708.78,1414.65 v1(2728.47,1434.33)
XL.PADDR22: U5.AD30 | length 27.8
  L1 TOP w5: U5.AD30@2590.67,1454.02 v1(2610.36,1473.7)
XL.PADDR23: U5.AC30 | length 27.8
  L1 TOP w5: U5.AC30@2551.3,1454.02 v1(2570.99,1473.7)
XL.PADDR24: U5.AY13 | length 27.8
  L1 TOP w5: U5.AY13@3220.59,784.72 v1(3240.28,765.04)
XL.PADDR25: U5.AV13 | length 27.8
  L1 TOP w5: U5.AV13@3141.85,784.72 v1(3161.54,765.04)
XL.PADDR26: U5.AD31 | length 27.8
  L1 TOP w5: U5.AD31@2590.67,1493.39 v1(2610.36,1513.07)
XL.PADDR27: U5.AB31 | length 27.8
  L1 TOP w5: U5.AB31@2511.93,1493.39 v1(2531.62,1513.07)
XL.PADDR28: U5.AC31 | length 27.8
  L1 TOP w5: U5.AC31@2551.3,1493.39 v1(2570.99,1513.07)
XL.PADDR29: U5.AA30 | length 27.8
  L1 TOP w5: v1(2452.87,1473.7) U5.AA30@2472.56,1454.02
XL.PBEN0: U5.Y30 | length 27.8
  L1 TOP w5: v1(2413.5,1473.7) U5.Y30@2433.19,1454.02
XL.PBEN1: U5.W31 | length 27.8
  L1 TOP w5: v1(2374.13,1513.07) U5.W31@2393.82,1493.39
XL.PBEN2: U5.R32 | length 27.8
  L1 TOP w5: v1(2216.65,1552.44) U5.R32@2236.34,1532.76
XL.PBEN3: U5.T32 | length 27.8
  L1 TOP w5: v1(2256.02,1552.44) U5.T32@2275.71,1532.76
XL.PBLASTN: U5.N34 | length 27.8
  L1 TOP w5: v1(2137.91,1631.18) U5.N34@2157.6,1611.5
XL.PCSN0: U5.N35 | length 27.8
  L1 TOP w5: v1(2137.91,1670.55) U5.N35@2157.6,1650.87
XL.PCSN1: U5.L39 | length 27.8
  L1 TOP w5: v1(2059.17,1828.03) U5.L39@2078.86,1808.35
XL.PCSN2: U5.T10 | length 27.8
  L1 TOP w5: v1(2256.02,646.93) U5.T10@2275.71,666.61
XL.PDATA0: U5.AR13 | length 27.8
  L1 TOP w5: U5.AR13@3023.74,784.72 v1(3043.43,765.04)
XL.PDATA1: U5.AP13 | length 27.8
  L1 TOP w5: U5.AP13@2984.37,784.72 v1(3004.06,765.04)
XL.PDATA2: U5.AU14 | length 27.8
  L1 TOP w5: U5.AU14@3102.48,824.09 v1(3122.17,804.41)
XL.PDATA3: U5.AV15 | length 27.8
  L1 TOP w5: U5.AV15@3141.85,863.46 v1(3161.54,843.78)
XL.PDATA4: U5.AT12 | length 27.8
  L1 TOP w5: U5.AT12@3063.11,745.35 v1(3082.8,725.67)
XL.PDATA5: U5.AR12 | length 27.8
  L1 TOP w5: U5.AR12@3023.74,745.35 v1(3043.43,725.67)
XL.PDATA6: U5.BA14 | length 27.8
  L1 TOP w5: U5.BA14@3259.96,824.09 v1(3279.65,804.41)
XL.PDATA7: U5.BA15 | length 27.8
  L1 TOP w5: U5.BA15@3259.96,863.46 v1(3279.65,843.78)
XL.PDATA8: U5.AW13 | length 27.8
  L1 TOP w5: U5.AW13@3181.22,784.72 v1(3200.91,765.04)
XL.PDATA9: U5.AW12 | length 27.8
  L1 TOP w5: U5.AW12@3181.22,745.35 v1(3200.91,725.67)
XL.PDATA10: U5.BB14 | length 27.8
  L1 TOP w5: U5.BB14@3299.33,824.09 v1(3319.02,804.41)
XL.PDATA11: U5.BB13 | length 27.8
  L1 TOP w5: U5.BB13@3299.33,784.72 v1(3319.02,765.04)
XL.PDATA12: U5.AU13 | length 27.8
  L1 TOP w5: U5.AU13@3102.48,784.72 v1(3122.17,765.04)
XL.PDATA13: U5.AU12 | length 27.8
  L1 TOP w5: U5.AU12@3102.48,745.35 v1(3122.17,725.67)
XL.PDATA14: U5.AW15 | length 27.8
  L1 TOP w5: U5.AW15@3181.22,863.46 v1(3200.91,843.78)
XL.PDATA15: U5.AY15 | length 27.8
  L1 TOP w5: U5.AY15@3220.59,863.46 v1(3240.28,843.78)
XL.PDATA16: U5.P33 | length 27.8
  L1 TOP w5: v1(2177.28,1591.81) U5.P33@2196.97,1572.13
XL.PDATA17: U5.N33 | length 27.8
  L1 TOP w5: v1(2137.91,1591.81) U5.N33@2157.6,1572.13
XL.PDATA18: U5.AG31 | length 27.8
  L1 TOP w5: U5.AG31@2708.78,1493.39 v1(2728.47,1513.07)
XL.PDATA19: U5.AH31 | length 27.8
  L1 TOP w5: U5.AH31@2748.15,1493.39 v1(2767.84,1513.07)
XL.PDATA20: U5.R30 | length 27.8
  L1 TOP w5: v1(2216.65,1473.7) U5.R30@2236.34,1454.02
XL.PDATA21: U5.T30 | length 27.8
  L1 TOP w5: v1(2256.02,1473.7) U5.T30@2275.71,1454.02
XL.PDATA22: U5.AF31 | length 27.8
  L1 TOP w5: U5.AF31@2669.41,1493.39 v1(2689.1,1513.07)
XL.PDATA23: U5.AG32 | length 27.8
  L1 TOP w5: U5.AG32@2708.78,1532.76 v1(2728.47,1552.44)
XL.PDATA24: U5.U31 | length 27.8
  L1 TOP w5: v1(2295.39,1513.07) U5.U31@2315.08,1493.39
XL.PDATA25: U5.T31 | length 27.8
  L1 TOP w5: v1(2256.02,1513.07) U5.T31@2275.71,1493.39
XL.PDATA26: U5.AL32 | length 27.8
  L1 TOP w5: U5.AL32@2866.26,1532.76 v1(2885.95,1552.44)
XL.PDATA27: U5.AK32 | length 27.8
  L1 TOP w5: U5.AK32@2826.89,1532.76 v1(2846.58,1552.44)
XL.PDATA28: U5.R33 | length 27.8
  L1 TOP w5: v1(2216.65,1591.81) U5.R33@2236.34,1572.13
XL.PDATA29: U5.P32 | length 27.8
  L1 TOP w5: v1(2177.28,1552.44) U5.P32@2196.97,1532.76
XL.PDATA30: U5.AH33 | length 27.8
  L1 TOP w5: U5.AH33@2748.15,1572.13 v1(2767.84,1591.81)
XL.PDATA31: U5.AJ33 | length 27.8
  L1 TOP w5: U5.AJ33@2787.52,1572.13 v1(2807.21,1591.81)
XL.PERCLK: U5.AY14 U5.K10 | length 55.7
  L1 TOP w5: v1(2019.8,646.93) U5.K10@2039.49,666.61 ; U5.AY14@3220.59,824.09 v1(3240.28,804.41)
XL.POEN: U5.AA31 | length 27.8
  L1 TOP w5: v1(2452.87,1513.07) U5.AA31@2472.56,1493.39
XL.PRDY: U5.L40 | length 27.8
  L1 TOP w5: v1(2059.17,1867.4) U5.L40@2078.86,1847.72
XL.PWRN: U5.V31 | length 27.8
  L1 TOP w5: v1(2334.76,1513.07) U5.V31@2354.45,1493.39
ZDOK0.CLK0_N: U5.K42 | length 27.8
  L1 TOP w3.8: v1(2019.8,1946.14) U5.K42@2039.49,1926.46
ZDOK0.CLK0_P: U5.J42 | length 27.8
  L1 TOP w3.8: v1(1980.43,1946.14) U5.J42@2000.12,1926.46
ZDOK0.CLK1_N: U5.P31 | length 27.8
  L1 TOP w3.8: v1(2177.28,1513.07) U5.P31@2196.97,1493.39
ZDOK0.CLK1_P: U5.P30 | length 27.8
  L1 TOP w3.8: v1(2177.28,1473.7) U5.P30@2196.97,1454.02
ZDOK0.DP_N0: U5.R27 | length 27.8
  L1 TOP w3.8: v1(2216.65,1355.59) U5.R27@2236.34,1335.91
ZDOK0.DP_N1: U5.N31 | length 27.8
  L1 TOP w3.8: v1(2137.91,1513.07) U5.N31@2157.6,1493.39
ZDOK0.DP_N2: U5.L36 | length 27.8
  L1 TOP w3.8: v1(2059.17,1709.92) U5.L36@2078.86,1690.24
ZDOK0.DP_N3: U5.K34 | length 27.8
  L1 TOP w3.8: v1(2019.8,1631.18) U5.K34@2039.49,1611.5
ZDOK0.DP_N4: U5.H35 | length 27.8
  L1 TOP w3.8: v1(1941.06,1670.55) U5.H35@1960.75,1650.87
ZDOK0.DP_N5: U5.G42 | length 27.8
  L1 TOP w3.8: v1(1901.69,1946.14) U5.G42@1921.38,1926.46
ZDOK0.DP_N6: 
ZDOK0.DP_N7: U5.C39 | length 27.8
  L1 TOP w3.8: v1(1744.21,1828.03) U5.C39@1763.9,1808.35
ZDOK0.DP_N8: U5.A39 | length 27.8
  L1 TOP w3.8: v1(1665.47,1828.03) U5.A39@1685.16,1808.35
ZDOK0.DP_N9: U5.B42 | length 27.8
  L1 TOP w3.8: v1(1704.84,1946.14) U5.B42@1724.53,1926.46
ZDOK0.DP_N10: U5.P28 | length 27.8
  L1 TOP w3.8: v1(2177.28,1394.96) U5.P28@2196.97,1375.28
ZDOK0.DP_N11: U5.L37 | length 27.8
  L1 TOP w3.8: v1(2059.17,1749.29) U5.L37@2078.86,1729.61
ZDOK0.DP_N12: U5.K32 | length 27.8
  L1 TOP w3.8: v1(2019.8,1552.44) U5.K32@2039.49,1532.76
ZDOK0.DP_N13: U5.K40 | length 27.8
  L1 TOP w3.8: v1(2019.8,1867.4) U5.K40@2039.49,1847.72
ZDOK0.DP_N14: U5.H41 | length 27.8
  L1 TOP w3.8: v1(1941.06,1906.77) U5.H41@1960.75,1887.09
ZDOK0.DP_N15: U5.G38 | length 27.8
  L1 TOP w3.8: v1(1901.69,1788.66) U5.G38@1921.38,1768.98
ZDOK0.DP_N16: U5.F42 | length 27.8
  L1 TOP w3.8: v1(1862.32,1946.14) U5.F42@1882.01,1926.46
ZDOK0.DP_N17: U5.C41 | length 27.8
  L1 TOP w3.8: v1(1744.21,1906.77) U5.C41@1763.9,1887.09
ZDOK0.DP_N18: U5.E38 | length 27.8
  L1 TOP w3.8: v1(1822.95,1788.66) U5.E38@1842.64,1768.98
ZDOK0.DP_N19: U5.A37 | length 27.8
  L1 TOP w3.8: v1(1665.47,1749.29) U5.A37@1685.16,1729.61
ZDOK0.DP_N20: U5.R29 | length 27.8
  L1 TOP w3.8: v1(2216.65,1434.33) U5.R29@2236.34,1414.65
ZDOK0.DP_N21: U5.M32 | length 27.8
  L1 TOP w3.8: v1(2098.54,1552.44) U5.M32@2118.23,1532.76
ZDOK0.DP_N22: U5.N30 | length 27.8
  L1 TOP w3.8: v1(2137.91,1473.7) U5.N30@2157.6,1454.02
ZDOK0.DP_N23: U5.M34 | length 27.8
  L1 TOP w3.8: v1(2098.54,1631.18) U5.M34@2118.23,1611.5
ZDOK0.DP_N24: U5.H34 | length 27.8
  L1 TOP w3.8: v1(1941.06,1631.18) U5.H34@1960.75,1611.5
ZDOK0.DP_N25: U5.G39 | length 27.8
  L1 TOP w3.8: v1(1901.69,1828.03) U5.G39@1921.38,1808.35
ZDOK0.DP_N26: U5.E37 | length 27.8
  L1 TOP w3.8: v1(1822.95,1749.29) U5.E37@1842.64,1729.61
ZDOK0.DP_N27: U5.D41 | length 27.8
  L1 TOP w3.8: v1(1783.58,1906.77) U5.D41@1803.27,1887.09
ZDOK0.DP_N28: U5.A41 | length 27.8
  L1 TOP w3.8: v1(1665.47,1906.77) U5.A41@1685.16,1887.09
ZDOK0.DP_N29: U5.L32 | length 27.8
  L1 TOP w3.8: v1(2059.17,1552.44) U5.L32@2078.86,1532.76
ZDOK0.DP_N30: U5.J36 | length 27.8
  L1 TOP w3.8: v1(1980.43,1709.92) U5.J36@2000.12,1690.24
ZDOK0.DP_N31: U5.J41 | length 27.8
  L1 TOP w3.8: v1(1980.43,1906.77) U5.J41@2000.12,1887.09
ZDOK0.DP_N32: U5.J38 | length 27.8
  L1 TOP w3.8: v1(1980.43,1788.66) U5.J38@2000.12,1768.98
ZDOK0.DP_N33: U5.H38 | length 27.8
  L1 TOP w3.8: v1(1941.06,1788.66) U5.H38@1960.75,1768.98
ZDOK0.DP_N34: U5.E40 | length 27.8
  L1 TOP w3.8: v1(1822.95,1867.4) U5.E40@1842.64,1847.72
ZDOK0.DP_N35: U5.F41 | length 27.8
  L1 TOP w3.8: v1(1862.32,1906.77) U5.F41@1882.01,1887.09
ZDOK0.DP_N36: U5.F36 | length 27.8
  L1 TOP w3.8: v1(1862.32,1709.92) U5.F36@1882.01,1690.24
ZDOK0.DP_N37: 
ZDOK0.DP_P0: U5.P27 | length 27.8
  L1 TOP w3.8: v1(2177.28,1355.59) U5.P27@2196.97,1335.91
ZDOK0.DP_P1: U5.M31 | length 27.8
  L1 TOP w3.8: v1(2098.54,1513.07) U5.M31@2118.23,1493.39
ZDOK0.DP_P2: U5.L35 | length 27.8
  L1 TOP w3.8: v1(2059.17,1670.55) U5.L35@2078.86,1650.87
ZDOK0.DP_P3: U5.K35 | length 27.8
  L1 TOP w3.8: v1(2019.8,1670.55) U5.K35@2039.49,1650.87
ZDOK0.DP_P4: U5.J35 | length 27.8
  L1 TOP w3.8: v1(1980.43,1670.55) U5.J35@2000.12,1650.87
ZDOK0.DP_P5: U5.G41 | length 27.8
  L1 TOP w3.8: v1(1901.69,1906.77) U5.G41@1921.38,1887.09
ZDOK0.DP_P6: 
ZDOK0.DP_P7: U5.B39 | length 27.8
  L1 TOP w3.8: v1(1704.84,1828.03) U5.B39@1724.53,1808.35
ZDOK0.DP_P8: U5.B38 | length 27.8
  L1 TOP w3.8: v1(1704.84,1788.66) U5.B38@1724.53,1768.98
ZDOK0.DP_P9: U5.B41 | length 27.8
  L1 TOP w3.8: v1(1704.84,1906.77) U5.B41@1724.53,1887.09
ZDOK0.DP_P10: U5.N28 | length 27.8
  L1 TOP w3.8: v1(2137.91,1394.96) U5.N28@2157.6,1375.28
ZDOK0.DP_P11: U5.K37 | length 27.8
  L1 TOP w3.8: v1(2019.8,1749.29) U5.K37@2039.49,1729.61
ZDOK0.DP_P12: U5.K33 | length 27.8
  L1 TOP w3.8: v1(2019.8,1591.81) U5.K33@2039.49,1572.13
ZDOK0.DP_P13: U5.K39 | length 27.8
  L1 TOP w3.8: v1(2019.8,1828.03) U5.K39@2039.49,1808.35
ZDOK0.DP_P14: U5.H40 | length 27.8
  L1 TOP w3.8: v1(1941.06,1867.4) U5.H40@1960.75,1847.72
ZDOK0.DP_P15: U5.G37 | length 27.8
  L1 TOP w3.8: v1(1901.69,1749.29) U5.G37@1921.38,1729.61
ZDOK0.DP_P16: U5.E42 | length 27.8
  L1 TOP w3.8: v1(1822.95,1946.14) U5.E42@1842.64,1926.46
ZDOK0.DP_P17: U5.C40 | length 27.8
  L1 TOP w3.8: v1(1744.21,1867.4) U5.C40@1763.9,1847.72
ZDOK0.DP_P18: U5.E39 | length 27.8
  L1 TOP w3.8: v1(1822.95,1828.03) U5.E39@1842.64,1808.35
ZDOK0.DP_P19: U5.B37 | length 27.8
  L1 TOP w3.8: v1(1704.84,1749.29) U5.B37@1724.53,1729.61
ZDOK0.DP_P20: U5.R28 | length 27.8
  L1 TOP w3.8: v1(2216.65,1394.96) U5.R28@2236.34,1375.28
ZDOK0.DP_P21: U5.M33 | length 27.8
  L1 TOP w3.8: v1(2098.54,1591.81) U5.M33@2118.23,1572.13
ZDOK0.DP_P22: U5.N29 | length 27.8
  L1 TOP w3.8: v1(2137.91,1434.33) U5.N29@2157.6,1414.65
ZDOK0.DP_P23: U5.L34 | length 27.8
  L1 TOP w3.8: v1(2059.17,1631.18) U5.L34@2078.86,1611.5
ZDOK0.DP_P24: U5.G34 | length 27.8
  L1 TOP w3.8: v1(1901.69,1631.18) U5.G34@1921.38,1611.5
ZDOK0.DP_P25: U5.F39 | length 27.8
  L1 TOP w3.8: v1(1862.32,1828.03) U5.F39@1882.01,1808.35
ZDOK0.DP_P26: U5.F37 | length 27.8
  L1 TOP w3.8: v1(1862.32,1749.29) U5.F37@1882.01,1729.61
ZDOK0.DP_P27: U5.D42 | length 27.8
  L1 TOP w3.8: v1(1783.58,1946.14) U5.D42@1803.27,1926.46
ZDOK0.DP_P28: U5.A40 | length 27.8
  L1 TOP w3.8: v1(1665.47,1867.4) U5.A40@1685.16,1847.72
ZDOK0.DP_P29: U5.L31 | length 27.8
  L1 TOP w3.8: v1(2059.17,1513.07) U5.L31@2078.86,1493.39
ZDOK0.DP_P30: U5.J37 | length 27.8
  L1 TOP w3.8: v1(1980.43,1749.29) U5.J37@2000.12,1729.61
ZDOK0.DP_P31: U5.J40 | length 27.8
  L1 TOP w3.8: v1(1980.43,1867.4) U5.J40@2000.12,1847.72
ZDOK0.DP_P32: U5.K38 | length 27.8
  L1 TOP w3.8: v1(2019.8,1788.66) U5.K38@2039.49,1768.98
ZDOK0.DP_P33: U5.H39 | length 27.8
  L1 TOP w3.8: v1(1941.06,1828.03) U5.H39@1960.75,1808.35
ZDOK0.DP_P34: U5.D40 | length 27.8
  L1 TOP w3.8: v1(1783.58,1867.4) U5.D40@1803.27,1847.72
ZDOK0.DP_P35: U5.F40 | length 27.8
  L1 TOP w3.8: v1(1862.32,1867.4) U5.F40@1882.01,1847.72
ZDOK0.DP_P36: U5.F35 | length 27.8
  L1 TOP w3.8: v1(1862.32,1670.55) U5.F35@1882.01,1650.87
ZDOK0.DP_P37: 
ZDOK1.CLK0_N: U5.V30 | length 27.8
  L1 TOP w3.8: v1(2334.76,1473.7) U5.V30@2354.45,1454.02
ZDOK1.CLK0_P: U5.W30 | length 27.8
  L1 TOP w3.8: v1(2374.13,1473.7) U5.W30@2393.82,1454.02
ZDOK1.CLK1_N: U5.AF30 | length 27.8
  L1 TOP w3.8: U5.AF30@2669.41,1454.02 v1(2689.1,1473.7)
ZDOK1.CLK1_P: U5.AE30 | length 27.8
  L1 TOP w3.8: U5.AE30@2630.04,1454.02 v1(2649.73,1473.7)
ZDOK1.DP_N0: U5.Y34 | length 27.8
  L1 TOP w3.8: v1(2413.5,1631.18) U5.Y34@2433.19,1611.5
ZDOK1.DP_N1: U5.Y37 | length 27.8
  L1 TOP w3.8: v1(2413.5,1749.29) U5.Y37@2433.19,1729.61
ZDOK1.DP_N2: U5.V35 | length 27.8
  L1 TOP w3.8: v1(2334.76,1670.55) U5.V35@2354.45,1650.87
ZDOK1.DP_N3: U5.U33 | length 27.8
  L1 TOP w3.8: v1(2295.39,1591.81) U5.U33@2315.08,1572.13
ZDOK1.DP_N4: U5.U41 | length 27.8
  L1 TOP w3.8: v1(2295.39,1906.77) U5.U41@2315.08,1887.09
ZDOK1.DP_N5: U5.T37 | length 27.8
  L1 TOP w3.8: v1(2256.02,1749.29) U5.T37@2275.71,1729.61
ZDOK1.DP_N6: U5.R34 | length 27.8
  L1 TOP w3.8: v1(2216.65,1631.18) U5.R34@2236.34,1611.5
ZDOK1.DP_N7: U5.P35 | length 27.8
  L1 TOP w3.8: v1(2177.28,1670.55) U5.P35@2196.97,1650.87
ZDOK1.DP_N8: U5.M42 | length 27.8
  L1 TOP w3.8: v1(2098.54,1946.14) U5.M42@2118.23,1926.46
ZDOK1.DP_N9: U5.L42 | length 27.8
  L1 TOP w3.8: v1(2059.17,1946.14) U5.L42@2078.86,1926.46
ZDOK1.DP_N10: U5.Y32 | length 27.8
  L1 TOP w3.8: v1(2413.5,1552.44) U5.Y32@2433.19,1532.76
ZDOK1.DP_N11: U5.AA39 | length 27.8
  L1 TOP w3.8: v1(2452.87,1828.03) U5.AA39@2472.56,1808.35
ZDOK1.DP_N12: U5.W33 | length 27.8
  L1 TOP w3.8: v1(2374.13,1591.81) U5.W33@2393.82,1572.13
ZDOK1.DP_N13: U5.W41 | length 27.8
  L1 TOP w3.8: v1(2374.13,1906.77) U5.W41@2393.82,1887.09
ZDOK1.DP_N14: U5.V39 | length 27.8
  L1 TOP w3.8: v1(2334.76,1828.03) U5.V39@2354.45,1808.35
ZDOK1.DP_N15: U5.T36 | length 27.8
  L1 TOP w3.8: v1(2256.02,1709.92) U5.T36@2275.71,1690.24
ZDOK1.DP_N16: U5.T42 | length 27.8
  L1 TOP w3.8: v1(2256.02,1946.14) U5.T42@2275.71,1926.46
ZDOK1.DP_N17: U5.P38 | length 27.8
  L1 TOP w3.8: v1(2177.28,1788.66) U5.P38@2196.97,1768.98
ZDOK1.DP_N18: U5.P37 | length 27.8
  L1 TOP w3.8: v1(2177.28,1749.29) U5.P37@2196.97,1729.61
ZDOK1.DP_N19: U5.N41 | length 27.8
  L1 TOP w3.8: v1(2137.91,1906.77) U5.N41@2157.6,1887.09
ZDOK1.DP_N20: U5.Y35 | length 27.8
  L1 TOP w3.8: v1(2413.5,1670.55) U5.Y35@2433.19,1650.87
ZDOK1.DP_N21: U5.Y33 | length 27.8
  L1 TOP w3.8: v1(2413.5,1591.81) U5.Y33@2433.19,1572.13
ZDOK1.DP_N22: U5.V36 | length 27.8
  L1 TOP w3.8: v1(2334.76,1709.92) U5.V36@2354.45,1690.24
ZDOK1.DP_N23: U5.W40 | length 27.8
  L1 TOP w3.8: v1(2374.13,1867.4) U5.W40@2393.82,1847.72
ZDOK1.DP_N24: U5.U38 | length 27.8
  L1 TOP w3.8: v1(2295.39,1788.66) U5.U38@2315.08,1768.98
ZDOK1.DP_N25: U5.R38 | length 27.8
  L1 TOP w3.8: v1(2216.65,1788.66) U5.R38@2236.34,1768.98
ZDOK1.DP_N26: U5.R42 | length 27.8
  L1 TOP w3.8: v1(2216.65,1946.14) U5.R42@2236.34,1926.46
ZDOK1.DP_N27: U5.P41 | length 27.8
  L1 TOP w3.8: v1(2177.28,1906.77) U5.P41@2196.97,1887.09
ZDOK1.DP_N28: U5.M39 | length 27.8
  L1 TOP w3.8: v1(2098.54,1828.03) U5.M39@2118.23,1808.35
ZDOK1.DP_N29: U5.AA37 | length 27.8
  L1 TOP w3.8: v1(2452.87,1749.29) U5.AA37@2472.56,1729.61
ZDOK1.DP_N30: U5.Y42 | length 27.8
  L1 TOP w3.8: v1(2413.5,1946.14) U5.Y42@2433.19,1926.46
ZDOK1.DP_N31: U5.Y39 | length 27.8
  L1 TOP w3.8: v1(2413.5,1828.03) U5.Y39@2433.19,1808.35
ZDOK1.DP_N32: U5.W38 | length 27.8
  L1 TOP w3.8: v1(2374.13,1788.66) U5.W38@2393.82,1768.98
ZDOK1.DP_N33: U5.U34 | length 27.8
  L1 TOP w3.8: v1(2295.39,1631.18) U5.U34@2315.08,1611.5
ZDOK1.DP_N34: U5.T35 | length 27.8
  L1 TOP w3.8: v1(2256.02,1670.55) U5.T35@2275.71,1650.87
ZDOK1.DP_N35: U5.T40 | length 27.8
  L1 TOP w3.8: v1(2256.02,1867.4) U5.T40@2275.71,1847.72
ZDOK1.DP_N36: U5.M37 | length 27.8
  L1 TOP w3.8: v1(2098.54,1749.29) U5.M37@2118.23,1729.61
ZDOK1.DP_N37: U5.N39 | length 27.8
  L1 TOP w3.8: v1(2137.91,1828.03) U5.N39@2157.6,1808.35
ZDOK1.DP_P0: U5.AA34 | length 27.8
  L1 TOP w3.8: v1(2452.87,1631.18) U5.AA34@2472.56,1611.5
ZDOK1.DP_P1: U5.W37 | length 27.8
  L1 TOP w3.8: v1(2374.13,1749.29) U5.W37@2393.82,1729.61
ZDOK1.DP_P2: U5.W35 | length 27.8
  L1 TOP w3.8: v1(2374.13,1670.55) U5.W35@2393.82,1650.87
ZDOK1.DP_P3: U5.U32 | length 27.8
  L1 TOP w3.8: v1(2295.39,1552.44) U5.U32@2315.08,1532.76
ZDOK1.DP_P4: U5.U42 | length 27.8
  L1 TOP w3.8: v1(2295.39,1946.14) U5.U42@2315.08,1926.46
ZDOK1.DP_P5: U5.R37 | length 27.8
  L1 TOP w3.8: v1(2216.65,1749.29) U5.R37@2236.34,1729.61
ZDOK1.DP_P6: U5.R35 | length 27.8
  L1 TOP w3.8: v1(2216.65,1670.55) U5.R35@2236.34,1650.87
ZDOK1.DP_P7: U5.P36 | length 27.8
  L1 TOP w3.8: v1(2177.28,1709.92) U5.P36@2196.97,1690.24
ZDOK1.DP_P8: U5.M41 | length 27.8
  L1 TOP w3.8: v1(2098.54,1906.77) U5.M41@2118.23,1887.09
ZDOK1.DP_P9: U5.L41 | length 27.8
  L1 TOP w3.8: v1(2059.17,1906.77) U5.L41@2078.86,1887.09
ZDOK1.DP_P10: U5.AA32 | length 27.8
  L1 TOP w3.8: v1(2452.87,1552.44) U5.AA32@2472.56,1532.76
ZDOK1.DP_P11: U5.Y38 | length 27.8
  L1 TOP w3.8: v1(2413.5,1788.66) U5.Y38@2433.19,1768.98
ZDOK1.DP_P12: U5.V33 | length 27.8
  L1 TOP w3.8: v1(2334.76,1591.81) U5.V33@2354.45,1572.13
ZDOK1.DP_P13: U5.V41 | length 27.8
  L1 TOP w3.8: v1(2334.76,1906.77) U5.V41@2354.45,1887.09
ZDOK1.DP_P14: U5.U39 | length 27.8
  L1 TOP w3.8: v1(2295.39,1828.03) U5.U39@2315.08,1808.35
ZDOK1.DP_P15: U5.U36 | length 27.8
  L1 TOP w3.8: v1(2295.39,1709.92) U5.U36@2315.08,1690.24
ZDOK1.DP_P16: U5.T41 | length 27.8
  L1 TOP w3.8: v1(2256.02,1906.77) U5.T41@2275.71,1887.09
ZDOK1.DP_P17: U5.R39 | length 27.8
  L1 TOP w3.8: v1(2216.65,1828.03) U5.R39@2236.34,1808.35
ZDOK1.DP_P18: U5.N36 | length 27.8
  L1 TOP w3.8: v1(2137.91,1709.92) U5.N36@2157.6,1690.24
ZDOK1.DP_P19: U5.N40 | length 27.8
  L1 TOP w3.8: v1(2137.91,1867.4) U5.N40@2157.6,1847.72
ZDOK1.DP_P20: U5.AA35 | length 27.8
  L1 TOP w3.8: v1(2452.87,1670.55) U5.AA35@2472.56,1650.87
ZDOK1.DP_P21: U5.W32 | length 27.8
  L1 TOP w3.8: v1(2374.13,1552.44) U5.W32@2393.82,1532.76
ZDOK1.DP_P22: U5.W36 | length 27.8
  L1 TOP w3.8: v1(2374.13,1709.92) U5.W36@2393.82,1690.24
ZDOK1.DP_P23: U5.V40 | length 27.8
  L1 TOP w3.8: v1(2334.76,1867.4) U5.V40@2354.45,1847.72
ZDOK1.DP_P24: U5.U37 | length 27.8
  L1 TOP w3.8: v1(2295.39,1749.29) U5.U37@2315.08,1729.61
ZDOK1.DP_P25: U5.T39 | length 27.8
  L1 TOP w3.8: v1(2256.02,1828.03) U5.T39@2275.71,1808.35
ZDOK1.DP_P26: U5.P42 | length 27.8
  L1 TOP w3.8: v1(2177.28,1946.14) U5.P42@2196.97,1926.46
ZDOK1.DP_P27: U5.P40 | length 27.8
  L1 TOP w3.8: v1(2177.28,1867.4) U5.P40@2196.97,1847.72
ZDOK1.DP_P28: U5.M38 | length 27.8
  L1 TOP w3.8: v1(2098.54,1788.66) U5.M38@2118.23,1768.98
ZDOK1.DP_P29: U5.AA36 | length 27.8
  L1 TOP w3.8: v1(2452.87,1709.92) U5.AA36@2472.56,1690.24
ZDOK1.DP_P30: U5.W42 | length 27.8
  L1 TOP w3.8: v1(2374.13,1946.14) U5.W42@2393.82,1926.46
ZDOK1.DP_P31: U5.Y40 | length 27.8
  L1 TOP w3.8: v1(2413.5,1867.4) U5.Y40@2433.19,1847.72
ZDOK1.DP_P32: U5.V38 | length 27.8
  L1 TOP w3.8: v1(2334.76,1788.66) U5.V38@2354.45,1768.98
ZDOK1.DP_P33: U5.V34 | length 27.8
  L1 TOP w3.8: v1(2334.76,1631.18) U5.V34@2354.45,1611.5
ZDOK1.DP_P34: U5.T34 | length 27.8
  L1 TOP w3.8: v1(2256.02,1631.18) U5.T34@2275.71,1611.5
ZDOK1.DP_P35: U5.R40 | length 27.8
  L1 TOP w3.8: v1(2216.65,1867.4) U5.R40@2236.34,1847.72
ZDOK1.DP_P36: U5.M36 | length 27.8
  L1 TOP w3.8: v1(2098.54,1709.92) U5.M36@2118.23,1690.24
ZDOK1.DP_P37: U5.N38 | length 27.8
  L1 TOP w3.8: v1(2137.91,1788.66) U5.N38@2157.6,1768.98
pads on no net: U1.C6 U2.C6 U4.A1 U4.A2 U4.A3 U4.A7 U4.A8 U4.A9 U4.B1 U4.B2 U4.B3 U4.B7 U4.B8 U4.B9 U4.C1 U4.C2 U4.C3 U4.C7 U4.C8 U4.C9 U4.D1 U4.D2 U4.D3 U4.D7 U4.D8 U4.D9 U4.E1 U4.E2 U4.E3 U4.E7 U4.E8 U4.E9 U4.F1 U4.F2 U4.F3 U4.F7 U4.F8 U4.F9 U4.G1 U4.G2 U4.G3 U4.G7 U4.G8 U4.G9 U4.H1 U4.H2 U4.H3 U4.H7 U4.H8 U4.H9 U4.J1 U4.J2 U4.J3 U4.J7 U4.J8 U4.J9 U4.K2 U4.K3 U4.K7 U4.K8 U4.K9 U4.L1 U4.L2 U4.L3 U4.L7 U4.L8 U4.M2 U4.M3 U4.M7 U4.M8 U4.M9 U4.N1 U4.N2 U4.N3 U4.N7 U4.N8 U4.P2 U4.P3 U4.P7 U4.P8 U4.P9 U4.R1 U4.R2 U4.R3 U4.R7 U4.R8 U5.A5 U5.A6 U5.A9 U5.A10 U5.A24 U5.A29 U5.A35 U5.A36 U5.AF7 U5.AF8 U5.AH24 U5.AJ25 U5.AK28 U5.AL20 U5.AL34 U5.AM26 U5.AM33 U5.AN28 U5.AN35 U5.AR34 U5.AR40 U5.AT15 U5.AT40 U5.AU9 U5.AU10 U5.AU16 U5.AU38 U5.AU42 U5.AW17 U5.AW32 U5.AW42 U5.B3 U5.B4 U5.B7 U5.B8 U5.B22 U5.B29 U5.B36 U5.BA30 U5.BB32 U5.C1 U5.C2 U5.C5 U5.C6 U5.C27 U5.D3 U5.D4 U5.J24 U5.J27 U5.J28 U5.K24 U5.L22 U5.L25 U5.L26 U5.L27 U5.M7 U5.M8 U5.M19 U5.M21 U5.M22 U5.M26 U5.N21 U5.N25 U5.P20 U5.P21 U5.P22 U5.P23 U5.P25 U5.R23 U5.T7 U5.T8 U5.V7 U5.V8